# Altium PCB ModuleAmp_PCB.PcbDoc
Units mm, origin at the board's own origin, x right, y up, seen from the top; angles counter-clockwise.
Board outline 152.4 x 101.6 mm, 2 copper layers (Top Layer, Bottom Layer), stack 1.671 mm thick; 16 components, 11 nets, 86 pads, 0 vias.
Unrouted connection lines stored in the file: 13.
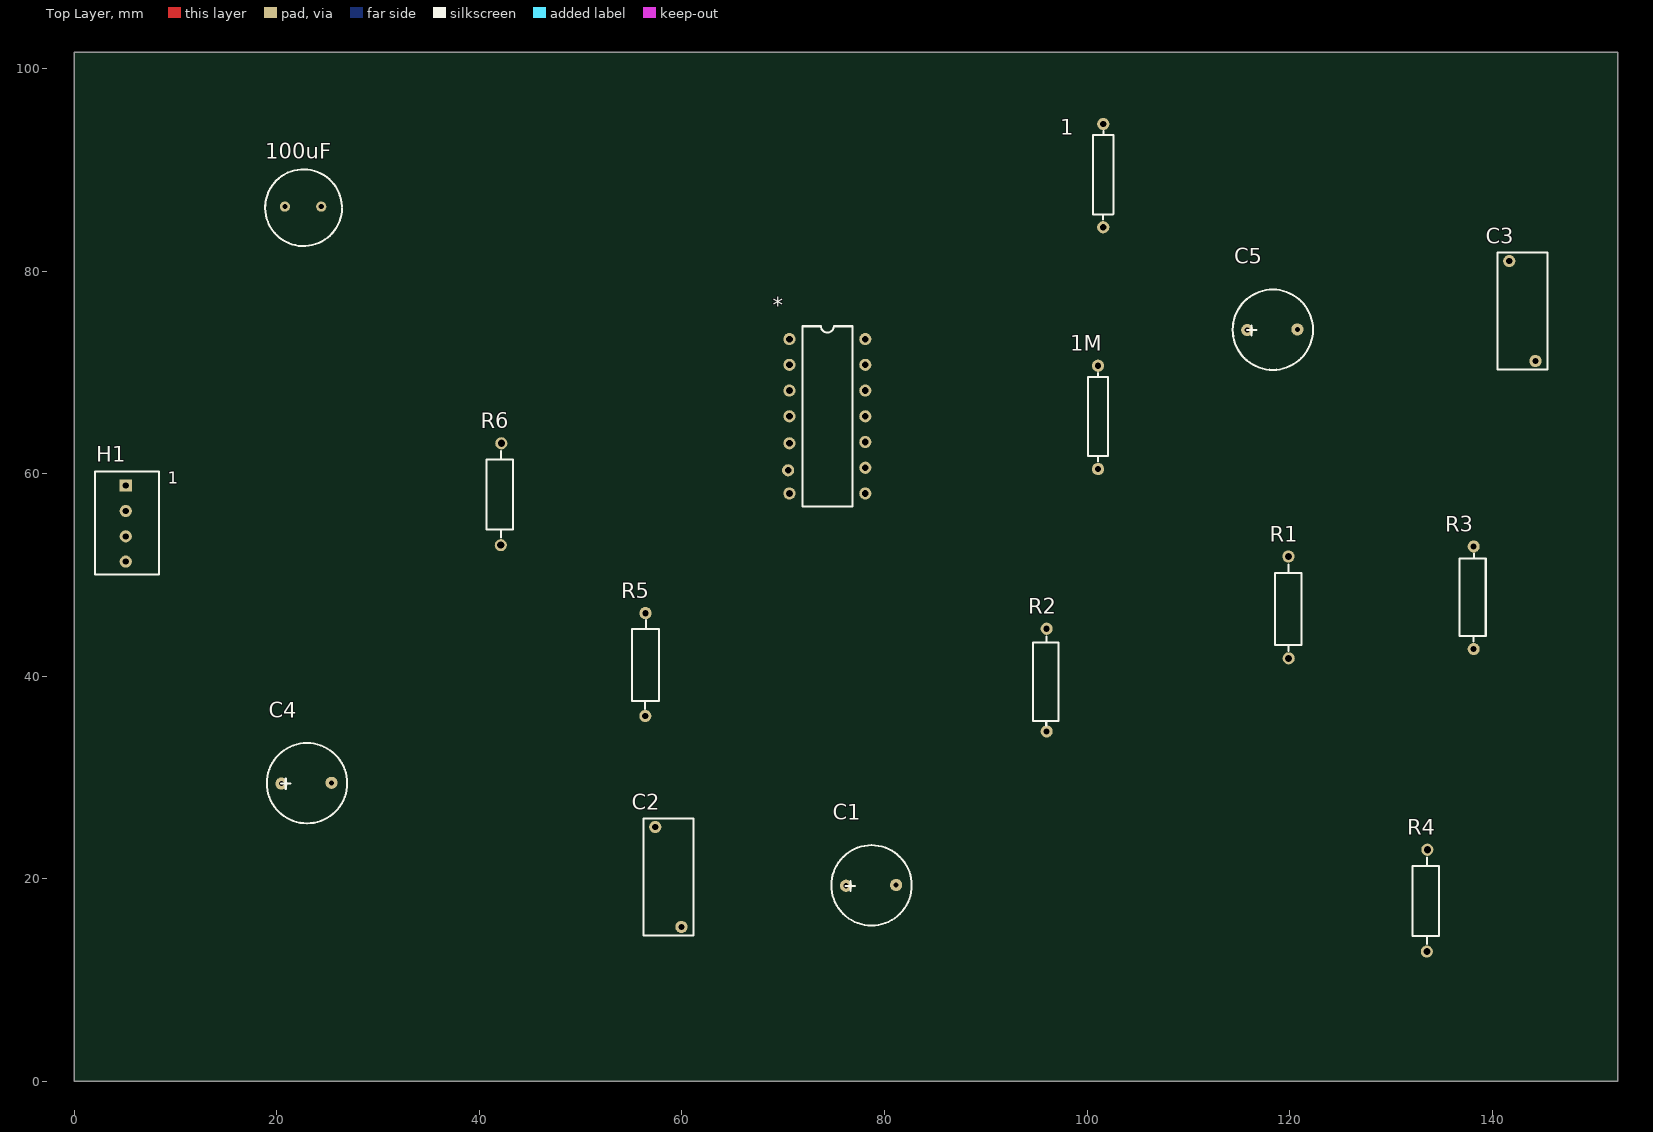
[diagram p0: Top Layer view]
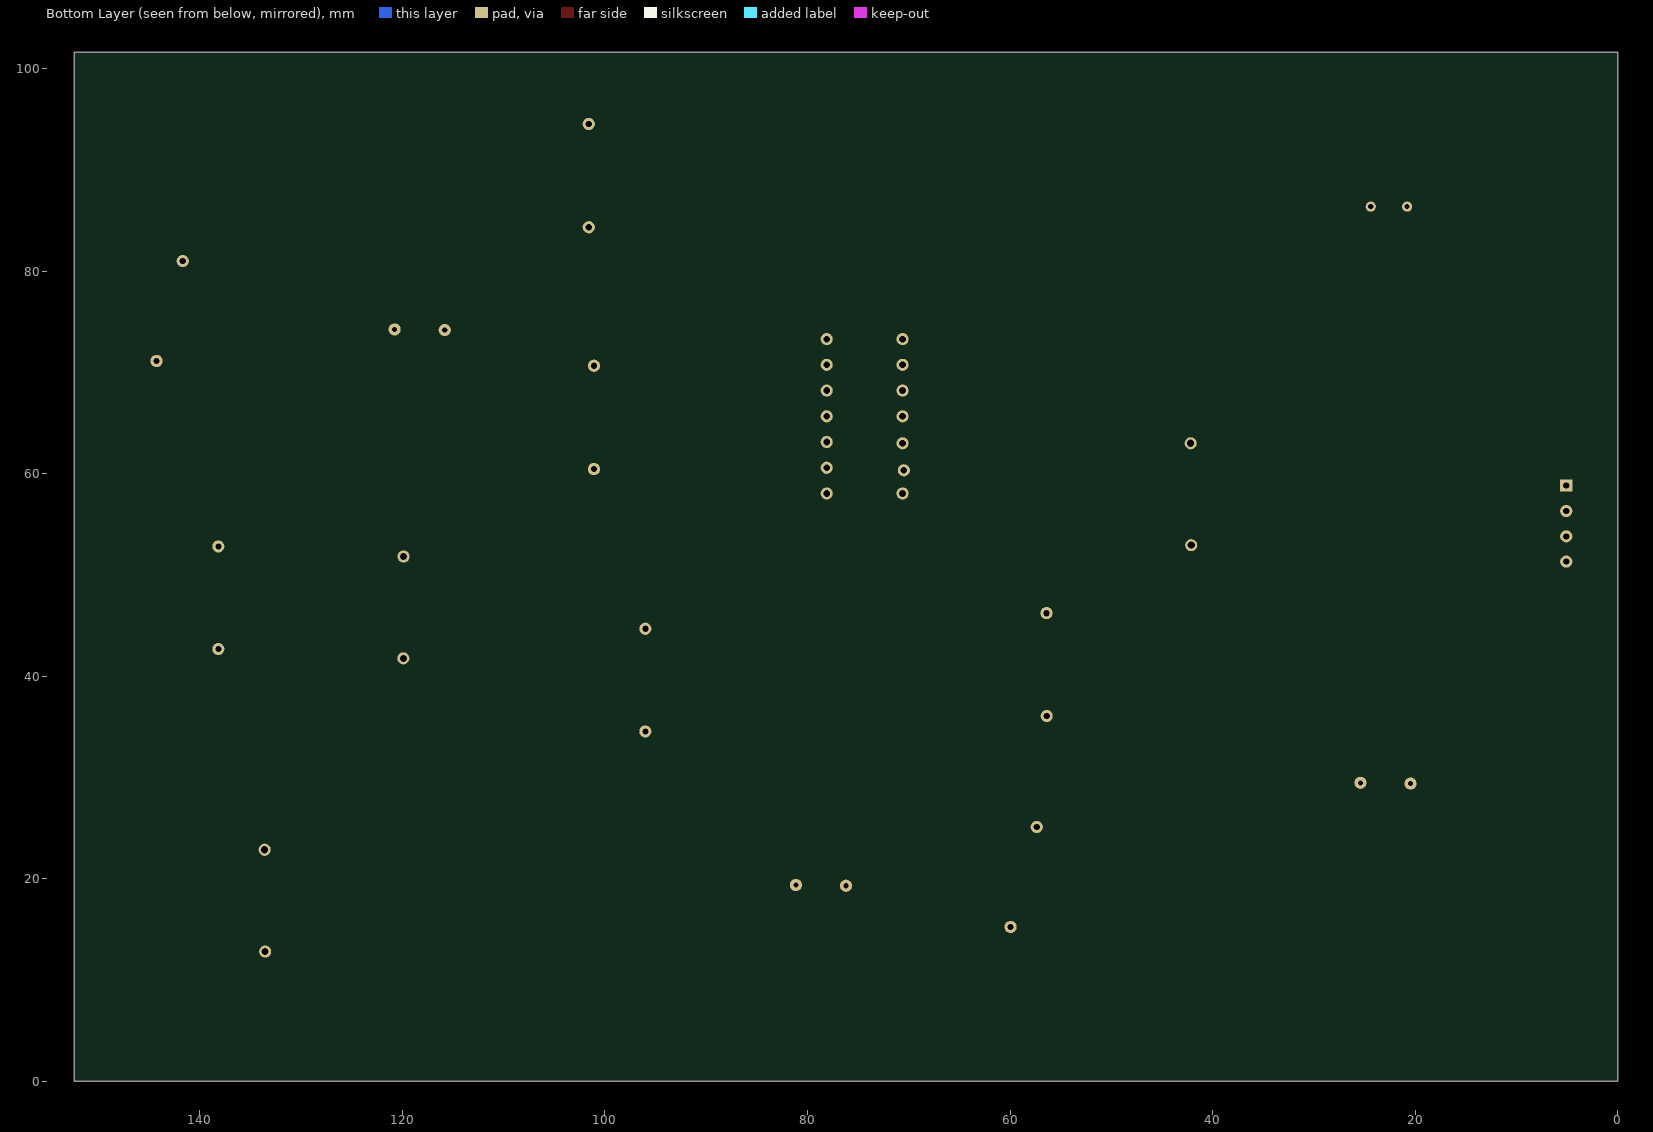
[diagram p1: Bottom Layer view, seen from below]

## Layer stack, top to bottom
Top Solder: solder mask 0.0102, Solder Resist, Dk 3.5
Top Layer: signal copper 0.0356
Dielectric 1: dielectric 1.6, FR-4, Dk 4.8
Bottom Layer: signal copper 0.0356
Bottom Solder: solder mask 0.0102, Solder Resist, Dk 3.5

## Board outline
0,0 152.4,0 152.4,101.6 0,101.6

## Design rules (kind name [scope] priority, off if disabled: settings)
Clearance [All] p1: gap=0.2 ignorepadtopadclearanceinfootprint=FALSE
PolygonConnect [All] p1: connectstyle=Relief reliefconductorwidth=0.254 reliefentries=4 polygonreliefangle="90 Angle" airgapwidth=0.254
RoomDefinition ModuleAmp [InComponentClass('ModuleAmp')] p1: confinementstyle=ConfineIn formatcopy=TRUE lockcomponents=FALSE outline 153.543,1.524 268.605,1.524 268.605,23.622 153.543,23.622
RoutingVias [All] p1: holewidth=0.3 width=0.6 viastyle="Through Hole" minholewidth=0.3 minwidth=0.6 maxholewidth=0.3 maxwidth=0.6
SilkToSolderMaskClearance [IsPad] p1: minsilkscreentomaskgap=0.1 clearancetoexposedcopper=TRUE
SolderMaskExpansion [All] p1: expansion=0.102 istentingtop=FALSE
Width [All] p1: maxlimit=1 minlimit=0.3 preferedwidth=0.5
29 further rules are at their usual default settings.

## Components (designator, comment, footprint, x,y, rotation, side; value= is the part's Value field where it differs from the comment)
1 "R?" R1M 101.6,84.328 r90 top
1M "R?" R1M 101.092,60.452 r90 top
100uF "C?" 100uF 20.788,86.364 r0 top
* "LM324N" LM324N 70.612,73.279 r0 top
C1 "4.7uF" "4.7uF Polarised" 76.193,19.305 r0 top
C2 "2.2nF" 2.2nF 59.954,15.236 r90 top
C3 "2.2nF" 2.2nF 144.282,71.116 r90 top
C4 "4.7uF" "4.7uF Polarised" 20.451,29.394 r0 top
C5 "4.7uF" "4.7uF Polarised" 115.817,74.169 r0 top
H1 "Header" "4x1 Male" 5.08,58.808 r0 top
R1 "10K" R10k 119.913,41.758 r90 top
R2 "12K" R12K 96.012,34.544 r90 top
R3 "8.2K" R8.2k 138.176,42.672 r90 top
R4 "100K" R100k 133.553,12.802 r90 top
R5 "330K" R330k 56.388,36.068 r90 top
R6 "100K" R100k 42.113,52.934 r90 top

## Footprints (in the part's own frame and the unit in brackets; to place one, negate y for a bottom-side part, rotate by r counter-clockwise, add the part's x,y. Pads: shape width x height; smd on the part's side, far side on the other; paste and mask are expansions set on the pad)
2.2nF [mm]
  round 1.2 hole 0.6: 1(0,0) 1(0.004,0.01) 2(9.866,2.587) 2(9.87,2.597)
  silkscreen extent -0.83,-1.17 10.7,3.75, body extent -0.68,-1.26 10.53,3.76, height 11.2
"4.7uF Polarised" [mm]
  round 1.2 hole 0.5: 1(0,0) 1(0.007,-0.001) 2(4.949,0.07) 2(4.957,0.069)
  silkscreen extent -1.44,-3.93 6.49,4, body extent -1.49,-3.94 6.51,4.06, height 11.51
"4x1 Male" [mm]
  rect 1.2x1.2 hole 0.6: 1(0,0) 1(0,0)
  round 1.2 hole 0.6: 2(0,-2.5) 2(0,-2.5) 3(0,-5) 3(0,-5) 4(0,-7.5) 4(0,-7.5)
  silkscreen extent -3.05,-8.76 3.3,1.4, body extent -3.1,-8.69 3.25,1.32, height 10.68
100uF [mm]
  round 1 hole 0.5: 1(0,0) 1(0.006,-0.004) 2(3.59,0) 2(3.596,-0.004)
  silkscreen extent -1.94,-3.9 5.64,3.68, body extent -2.2,-4.06 5.81,3.94, height 12.51
LM324N [mm]
  round 1.2 hole 0.66: 1(0,0) 1(0,0) 2(0,-2.54) 2(0,-2.54) 3(0,-5.08) 3(0,-5.08) 4(0,-7.62) 4(0,-7.62) 5(0,-10.287) 5(0,-10.287) 6(-0.127,-12.954) 6(-0.127,-12.954) 7(0,-15.24) 7(0,-15.24) 8(7.493,-15.24) 8(7.493,-15.24) 9(7.493,-12.7) 9(7.493,-12.7) 10(7.493,-10.16) 10(7.493,-10.16) 11(7.493,-7.62) 11(7.493,-7.62) 12(7.493,-5.08) 12(7.493,-5.08) 13(7.493,-2.54) 13(7.493,-2.54) 14(7.493,0) 14(7.493,0)
  silkscreen extent 1.27,-16.51 6.22,1.27, body extent -0.38,-17.59 7.49,2.1, height 4.56
R1M [mm]
  round 1.2 hole 0.6: 1(-0.01,0.005) 1(0,0) 2(10.19,0.005) 2(10.2,0)
  silkscreen extent 0.76,-1 9.5,1, body extent -0.3,-1.25 10.47,1.16, height 2.41
R8.2k [mm]
  round 1.2 hole 0.6: 1(0,0) 1(0,0) 2(10.135,0) 2(10.135,0)
  silkscreen extent 0.76,-1.19 9.42,1.4, body extent -0.3,-1.1 10.46,1.3, height 2.41
R10k [mm]
  round 1.2 hole 0.7: 1(0,0) 2(10.058,0.025)
  silkscreen extent 0.74,-1.24 9.27,1.37, body extent -0.33,-1.14 10.43,1.26, height 2.41
R12K [mm]
  round 1.2 hole 0.6: 1(0,0) 1(0,0) 2(10.135,0) 2(10.135,0)
  silkscreen extent 0.56,-1.19 9.35,1.35, body extent -0.3,-1.15 10.46,1.25, height 2.41
R100k [mm]
  round 1.2 hole 0.7: 1(0,0) 2(10.058,-0.051)
  silkscreen extent 0.76,-1.22 9.3,1.4, body extent -0.33,-1.12 10.43,1.28, height 2.41
R330k [mm]
  round 1.2 hole 0.63: 1(-0.003,0) 1(0,0) 2(10.154,-0.013) 2(10.156,-0.013)
  silkscreen extent 0.71,-1.34 9.45,1.32, body extent -0.3,-1.21 10.46,1.19, height 2.41

## Part data
1 1M: library part RNV14FAL1M00, "Res Metal Film 1MegaOhm 1% 1/4W ±100ppm/°C Conformal Axial Box", Case/Package=Axial, Manufacturer="Stackpole Electronics", Max Operating Temperature=155°C, Max Power Dissipation=250mW, Min Operating Temperature=-55°C, Resistance=1MR, Supplier Part Number 1=RNV14FAL1M00CT-ND, Temperature Coefficient=200ppm/°C, Tolerance=1%, Category="Through-Hole Resistors", ComponentLink1Description=https://www.seielect.com/Catalog/SEI-RNV.pdf?src-supplier=Digikey, ComponentLink1URL=https://www.seielect.com/Catalog/SEI-RNV.pdf?src-supplier=Digikey, Features="Moisture Resistant,Flame Retardant Coating", Manufacturer Part Number=RNV14FAL1M00, Mount="Through Hole,Axial", Number of Terminations=2, Packaging="Cut Tape", Pricing 1="1=0.24, 10=0.19, 25=0.1456, 50=0.1054, 100=0.0742, 250=0.06, 500=0.04726, 1000=0.03272 (USD)", RoHS=Yes, RoHS Compliant=Yes, Series=RNV, Stock 1=115801, Supplier 1=Digikey
100uF: library part ESK107M025AE3EA, "Radial Can ALUMINUM ELECTROLYTIC CAPACITOR ESK 25V 100muF ±20% 0.248Dia 6.30mm", Manufacturer=KEMET, Supplier Part Number 1=399-6650-1-ND, Category="Aluminum Electrolytic Capacitors", ComponentLink1Description=https://datasheet.ciiva.com/5336/datasheetpn-esk107m025ae3ea-5336461.pdf?src-supplier=Mouser, ComponentLink1URL=https://datasheet.ciiva.com/5336/datasheetpn-esk107m025ae3ea-5336461.pdf?src-supplier=Mouser, Manufacturer Part Number=ESK107M025AE3EA, Pricing 1="1=0.24, 10=0.157, 50=0.099, 100=0.0793, 500=0.05724, 1000=0.05064 (USD)", RoHS=Yes, Stock 1=196242, Supplier 1=Digikey
*: "Operational Amplifier, Quad, 1 Mhz, 4, 0.5 V/ S, 1.5V To 16V, Dip, 14 Rohs Compliant: Yes", Manufacturer="Texas Instruments", Supplier Part Number 1=296-1391-5-ND, Category="Amplifiers - Op Amps, Buffer, Instrumentation", ComponentLink1Description=https://datasheet.ciiva.com/5997/1768103-5997424.pdf?src-supplier=Farnell, ComponentLink1URL=https://datasheet.ciiva.com/5997/1768103-5997424.pdf?src-supplier=Farnell, ComponentLink2Description=https://datasheet.ciiva.com/1796/lm224-1796723.pdf?src-supplier=Digikey, ComponentLink2URL=https://datasheet.ciiva.com/1796/lm224-1796723.pdf?src-supplier=Digikey, ComponentLink3Description=https://datasheet.ciiva.com/7148/lm224-7148869.pdf?src-supplier=Newark, ComponentLink3URL=https://datasheet.ciiva.com/7148/lm224-7148869.pdf?src-supplier=Newark, ComponentLink4Description=https://datasheet.ciiva.com/8008/1905671-8008853.pdf?src-supplier=Element14, ComponentLink4URL=https://datasheet.ciiva.com/8008/1905671-8008853.pdf?src-supplier=Element14, ComponentLink5Description=https://datasheet.ciiva.com/7709/1840878-7709815.pdf?src-supplier=Element14, ComponentLink5URL=https://datasheet.ciiva.com/7709/1840878-7709815.pdf?src-supplier=Element14, ComponentLink6Description=https://datasheet.ciiva.com/7709/1840878-7709816.pdf?src-supplier=Element14, ComponentLink6URL=https://datasheet.ciiva.com/7709/1840878-7709816.pdf?src-supplier=Element14, Manufacturer Part Number=LM324N, Pricing 1="1=0.44, 10=0.375, 25=0.35, 100=0.28, 250=0.25996, 500=0.21998, 1000=0.16998, 2500=0.15498, 5000=0.14499 (USD)", RoHS=No, Stock 1=30137, Supplier 1=Digikey
C1 C4 C5: library part ECA-2EM4R7B, "Cap Aluminum 4.7uF 250V 20% (8 X 11.5mm) Radial 5mm 86mA 2000 hr 85°C Ammo Pack", Manufacturer=Panasonic, Supplier Part Number 1=10-ECA-2EM4R7BCT-ND, Category="Aluminum Electrolytic Capacitors", ComponentLink1Description=https://datasheet.ciiva.com/15198/getdatasheetpartid-481540-15198057.pdf?src-supplier=Verical, ComponentLink1URL=https://datasheet.ciiva.com/15198/getdatasheetpartid-481540-15198057.pdf?src-supplier=Verical, Manufacturer Part Number=ECA-2EM4R7B, Pricing 1="1=0.47, 10=0.307, 50=0.2264, 100=0.1843, 500=0.14554 (USD)", RoHS=Yes, Stock 1=1000, Supplier 1=Digikey
C2: library part C731U222MZWDAA7317, "Suppression Cap, 2200Pf, Class X1/ Y2 Rohs Compliant: Yes", Manufacturer=KEMET, Supplier Part Number 1=399-C731U222MZWDAA7317CT-ND, Category="Ceramic Capacitors", Manufacturer Part Number=C731U222MZWDAA7317, Pricing 1="1=0.43, 10=0.287, 50=0.2282, 100=0.1885, 500=0.14726 (USD)", RoHS=Yes, RoHS Compliant=Yes, Stock 1=9860, Supplier 1=Digikey
C3: library part C731U222MZWDAA7317_1, "Suppression Cap, 2200Pf, Class X1/ Y2 Rohs Compliant: Yes", Manufacturer=KEMET, Manufacturer Part Number=C731U222MZWDAA7317, Supplier Part Number 1=399-C731U222MZWDAA7317CT-ND, Category="Ceramic Capacitors", Pricing 1="1=0.43, 10=0.287, 50=0.2282, 100=0.1885, 500=0.14726 (USD)", RoHS=Yes, RoHS Compliant=Yes, Stock 1=9860, Supplier 1=Digikey
H1: library part 22-23-2041, "KK 254 Solid Header, Vertical, with Friction Lock, 4 Circuits, Tin (Sn) Plating", Manufacturer=Molex, Supplier Part Number 1=WM4202-ND, Category="Headers and Wire Housings", ComponentLink1Description=https://datasheet.ciiva.com/5151/0022232041-pcb-headers-227043-5151795.pdf?src-supplier=Mouser, ComponentLink1URL=https://datasheet.ciiva.com/5151/0022232041-pcb-headers-227043-5151795.pdf?src-supplier=Mouser, ComponentLink2Description=https://datasheet.ciiva.com/11747/0900766b80d8f4d1-11747883.pdf?src-supplier=Rs, ComponentLink2URL=https://datasheet.ciiva.com/11747/0900766b80d8f4d1-11747883.pdf?src-supplier=Rs, ComponentLink3Description=https://datasheet.ciiva.com/19462/1966245-19462162.pdf?src-supplier=Jameco, ComponentLink3URL=https://datasheet.ciiva.com/19462/1966245-19462162.pdf?src-supplier=Jameco, ComponentLink4Description=https://datasheet.ciiva.com/19454/232282-19454309.pdf?src-supplier=Jameco, ComponentLink4URL=https://datasheet.ciiva.com/19454/232282-19454309.pdf?src-supplier=Jameco, ComponentLink5Description=https://datasheet.ciiva.com/7106/1859840-7106278.pdf?src-supplier=Newark, ComponentLink5URL=https://datasheet.ciiva.com/7106/1859840-7106278.pdf?src-supplier=Newark, ComponentLink6Description=https://datasheet.ciiva.com/7843/1896518-7843901.pdf?src-supplier=Element14, ComponentLink6URL=https://datasheet.ciiva.com/7843/1896518-7843901.pdf?src-supplier=Element14, ComponentLink7Description=https://datasheet.ciiva.com/16725/0022232041-pcb-headers-16725643.pdf?, ComponentLink7URL=https://datasheet.ciiva.com/16725/0022232041-pcb-headers-16725643.pdf?, Manufacturer Part Number=22-23-2041, Pricing 1="1=0.35, 10=0.281, 100=0.206, 1000=0.16385, 5000=0.14044, 10000=0.13108 (USD)", RoHS=Yes, Stock 1=35244, Supplier 1=Digikey
R1: library part CF14JT10K0, "Res Carbon Film 10K Ohm 5% 0.25W(1/4W) -500ppm/ to 0ppm", Manufacturer="Stackpole Electronics", Category="Through-Hole Resistors", ComponentLink1Description=http://components.arrow.com/part/dataview/27619991S9848636N1174?src-supplier=Arrow+Electronics, ComponentLink1URL=http://components.arrow.com/part/dataview/27619991S9848636N1174?src-supplier=Arrow+Electronics, ComponentLink2Description=https://www.seielect.com/catalog/SEI-Packaging.pdf?src-supplier=Digikey, ComponentLink2URL=https://www.seielect.com/catalog/SEI-Packaging.pdf?src-supplier=Digikey, ComponentLink3Description=https://www.verical.com/server-webapp/html/getDatasheet?partID=367360&src-supplier=Verical, ComponentLink3URL=https://www.verical.com/server-webapp/html/getDatasheet?partID=367360&src-supplier=Verical, ComponentLink4Description=https://www.seielect.com/catalog/SEI-CF_CFM.pdf?src-supplier=Avnet, ComponentLink4URL=https://www.seielect.com/catalog/SEI-CF_CFM.pdf?src-supplier=Avnet, ComponentLink5Description=http://www.seielect.com/Catalog/SEI-CF_CFM.pdf?src-supplier=Future+Electronics, ComponentLink5URL=http://www.seielect.com/Catalog/SEI-CF_CFM.pdf?src-supplier=Future+Electronics, ComponentLink6Description=https://datasheet.octopart.com/CF14JT10K0-Stackpole-Electronics-datasheet-8325406.pdf?src-supplier=Future+Electronics, ComponentLink6URL=https://datasheet.octopart.com/CF14JT10K0-Stackpole-Electronics-datasheet-8325406.pdf?src-supplier=Future+Electronics, Lead Free=5697LeadFree, Manufacturer Part Number=CF14JT10K0, Pricing 1="5000=0.0073, 10000=0.0064 (USD)", RoHS=Yes, Stock 1=580000, Supplier 1="Arrow Electronics", Supplier Part Number 1=CF14JT10K0
R2: library part RNMF14FTC12K0, "Res Metal Film 12K Ohm 1% 1/4W ±50ppm/°C Conformal Axial Thru-Hole T/R", Case/Package=Axial, Manufacturer="Stackpole Electronics", Max Operating Temperature=155°C, Max Power Dissipation=250mW, Min Operating Temperature=-55°C, Package Quantity=1, Resistance=12kR, Temperature Coefficient=50ppm/°C, Tolerance=1%, Category="Through-Hole Resistors", ComponentLink1Description=http://www.seielect.com/Catalog/SEI-RNF_RNMF.pdf?src-supplier=Avnet, ComponentLink1URL=http://www.seielect.com/Catalog/SEI-RNF_RNMF.pdf?src-supplier=Avnet, ComponentLink2Description=https://www.seielect.com/catalog/SEI-Packaging.pdf?src-supplier=Digikey, ComponentLink2URL=https://www.seielect.com/catalog/SEI-Packaging.pdf?src-supplier=Digikey, Contact Plating=Tin,Matte, Diameter=2.35mm, Features="Flame Retardant Coating", Length=0.13inch, Manufacturer Part Number=RNMF14FTC12K0, Mount="Through Hole", Number of Terminations=2, Packaging="Tape and Reel", Pricing 1="1=0.041, 10=0.0205, 25=0.02, 100=0.0192, 250=0.0184, 500=0.0176, 1000=0.0168 (USD)", Radiation Hardening=No, RoHS=Yes, RoHS Compliant=Yes, Series=RNMF, Stock 1=1810, Supplier 1="Arrow Electronics", Supplier Part Number 1=RNMF14FTC12K0
R3: library part PCF14JT8K20, "Res Carbon Film 8.2K Ohm 5% 1/4W -400ppm/°C to 0ppm/°C Conformal AXL Thru-Hole T/R", Manufacturer="Stackpole Electronics", Supplier Part Number 1=738-PCF14JT8K20CT-ND, Category="Through-Hole Resistors", ComponentLink1Description=http://www.seielect.com/Catalog/SEI-CF_CFM.pdf?src-supplier=Future+Electronics, ComponentLink1URL=http://www.seielect.com/Catalog/SEI-CF_CFM.pdf?src-supplier=Future+Electronics, ComponentLink2Description=https://www.seielect.com/catalog/sei-cf_cfm.pdf?src-supplier=Digikey, ComponentLink2URL=https://www.seielect.com/catalog/sei-cf_cfm.pdf?src-supplier=Digikey, ComponentLink3Description=https://www.seielect.com/catalog/SEI-CF_CFM.pdf?src-supplier=Avnet, ComponentLink3URL=https://www.seielect.com/catalog/SEI-CF_CFM.pdf?src-supplier=Avnet, Manufacturer Part Number=PCF14JT8K20, Pricing 1="1=0.12, 10=0.1, 25=0.0728, 50=0.0566, 100=0.0384, 250=0.03152, 500=0.02504, 1000=0.01778 (USD)", RoHS=Yes, Stock 1=5384, Supplier 1=Digikey
R4 R6: library part 1625892-8, "Resistor, Metal Oxide, Res 100 Kilohms, Pwr-Rtg 3 W, Tol 5%, Axial", Manufacturer="TE Connectivity", Number of Resistors=1NUMBER, Operating Supply Voltage=350V, Supplier Part Number 1=1372756, Category="Through-Hole Resistors", ComponentLink1Description=https://datasheet.ciiva.com/6532/eng-ds-1773271-e-6532845.pdf?src-supplier=Digikey, ComponentLink1URL=https://datasheet.ciiva.com/6532/eng-ds-1773271-e-6532845.pdf?src-supplier=Digikey, ComponentLink2Description=https://datasheet.ciiva.com/45988/eng-ds-1773271-d-45988154.pdf?src-supplier=Onlinecomponents.com, ComponentLink2URL=https://datasheet.ciiva.com/45988/eng-ds-1773271-d-45988154.pdf?src-supplier=Onlinecomponents.com, ComponentLink3Description=https://datasheet.ciiva.com/17060/eng-ds-1773271-a-17060600.pdf?, ComponentLink3URL=https://datasheet.ciiva.com/17060/eng-ds-1773271-a-17060600.pdf?, ELV=5681ELVCompliant, Lead/Base Style=4746ConnectorType, Manufacturer Part Number=1625892-8, Number of Pins=2NUMBER, Pricing 1="50=0.232, 500=0.213, 1000=0.192, 2000=0.172, 4000=0.151 (GBP)", Reach SVHC Compliant=4186SVHC, RoHS=Yes, Stock 1=2000, Supplier 1=Rs, Voltage Rating=350V, Voltage Rating (DC)=350V
R5: library part RN65D3303FB14, "Metal Film Resistors - Through Hole 1/2watt 330Kohms 1% 100ppm", Case/Package=Axial, Manufacturer="Vishay Dale", Max Operating Temperature=175°C, Max Power Dissipation=500mW, Min Operating Temperature=-65°C, Package Quantity=100, Resistance=330kR, Supplier Part Number 1=71-RN65D-F-330K, Temperature Coefficient=100ppm/°C, Tolerance=1%, Voltage Rating=350V, Category="Through-Hole Resistors", ComponentLink1Description=https://datasheet.ciiva.com/13963/cmfmil-13963855.pdf?src-supplier=Digikey, ComponentLink1URL=https://datasheet.ciiva.com/13963/cmfmil-13963855.pdf?src-supplier=Digikey, Features="Moisture Resistant,Military,Flame Retardant Coating", Lead Diameter=0.64mm, Lead Free="Contains Lead", Length=0.562inch, Manufacturer Part Number=RN65D3303FB14, Mount="Through Hole", Number of Terminations=2, Packaging=Bulk, Power Rating=500mW, Pricing 1="1=0.53, 10=0.429, 50=0.429, 100=0.429, 1000=0.429, 10000=0.272 (USD)", RoHS=No, RoHS Compliant=No, Series="Military, MIL-R-10509/2, RN65", Stock 1=509, Supplier 1=Mouser, Termination=Axial, Width=4.57mm

## Nets (pads, with @x,y where several pads share a name; then routed paths per layer and width w, separated by ;. In a path a pad name is that pad's centre, name@x,y a point inside that pad or via, vN(x,y) a via of type N, cw(c..) or ccw(c..) an arc to the next point about the centre after c; other vN are vias at no path point)
+5: *.4 R6.2
GND: *.11 R2.2 R4.2
Net1_1: 1.1 *.2 R1.1
Net1_2: 1.2 *.1
Net1M_1: 1M.1 *.6 R3.1
Net1M_2: 1M.2 *.7
Net*_3: *.3 R5.1
Net*_5: *.5 R4.1 R5.2 R6.1
NetC1_+: R1.2
NetC4_+: R3.2
NetC5_-: R2.1
pads on no net: 100uF.1 100uF.2 *.8 *.9 *.10 *.12 *.13 *.14 C1.1 C1.2 C2.1 C2.2 C3.1 C3.2 C4.1 C4.2 C5.1 C5.2 H1.1 H1.2 H1.3 H1.4

## Text inside footprints (layer, text, board x,y; h text height)
H1: Top Overlay "1" at 9.217,59.008 h1.2